# Altium PCB smart-water-sensor.PcbDoc (part 1 of 5)
Units mm, origin at the board's own origin, x right, y up, seen from the top; angles counter-clockwise.
Board outline 124.33 x 108.9 mm, 4 copper layers (Top Layer, Layer 1, Layer 2, Bottom Layer), stack 0.603 mm thick; 150 components, 74 nets, 469 pads, 463 vias.
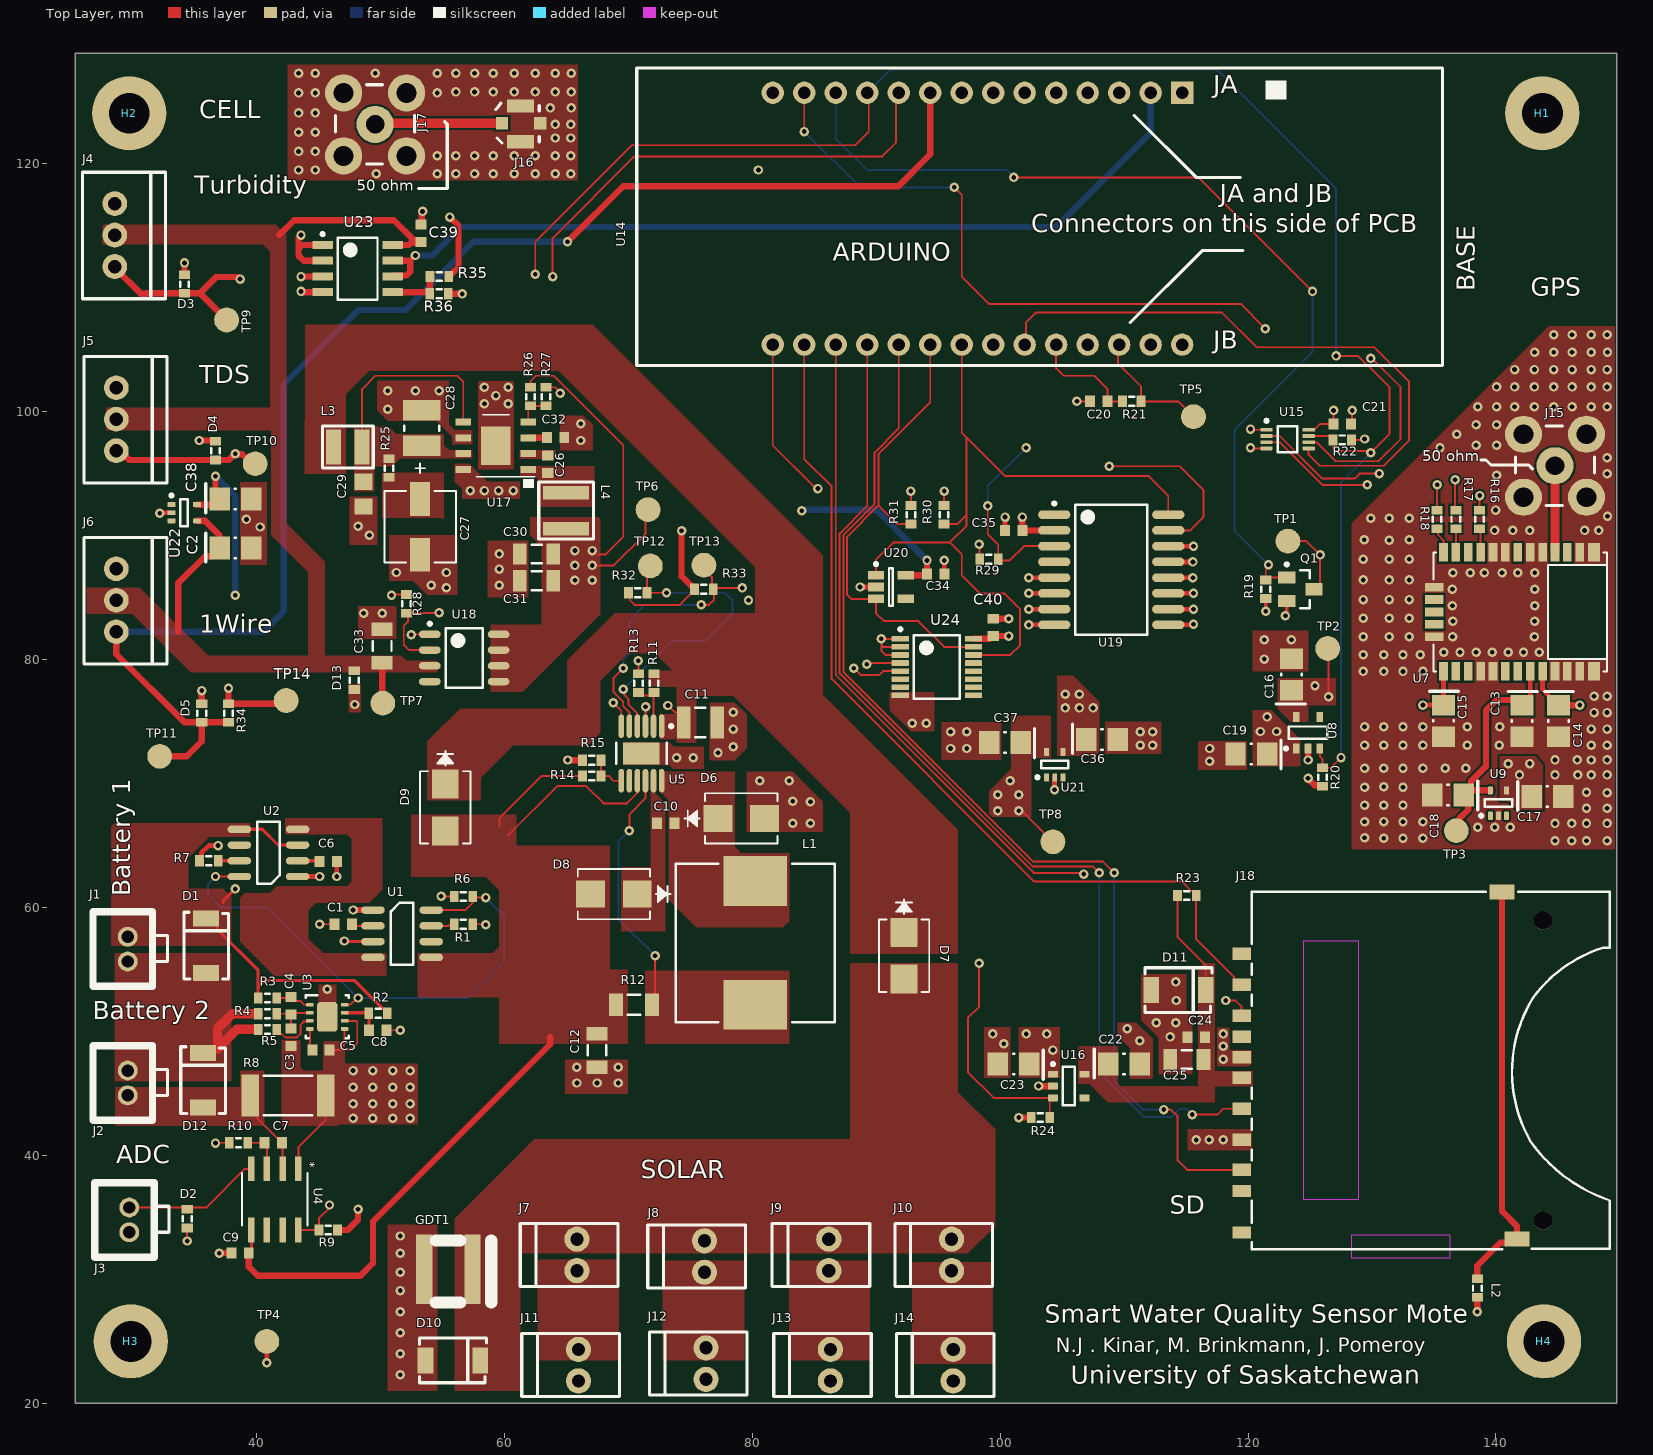
[diagram p0: Top Layer view]
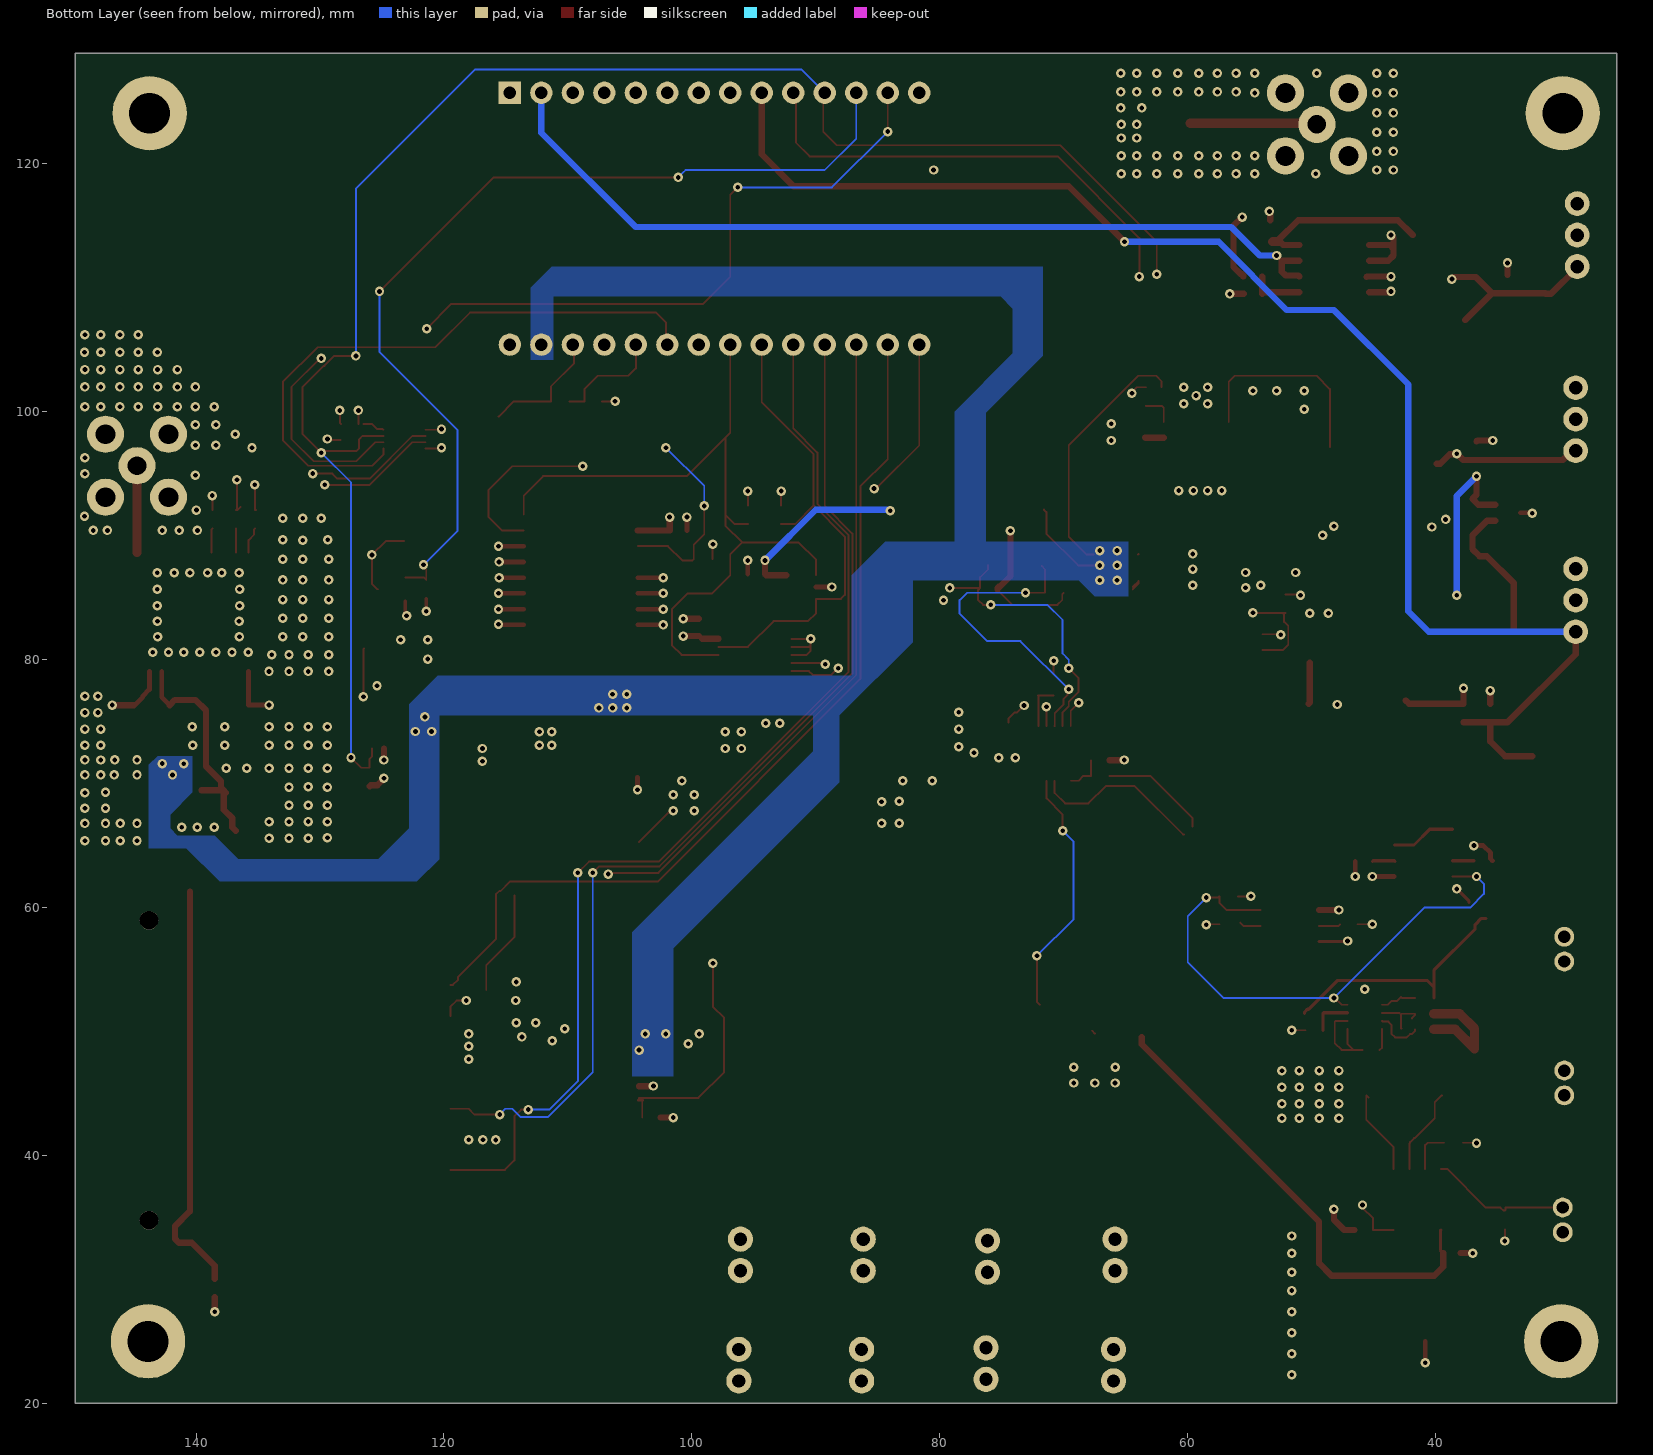
[diagram p1: Bottom Layer view, seen from below]
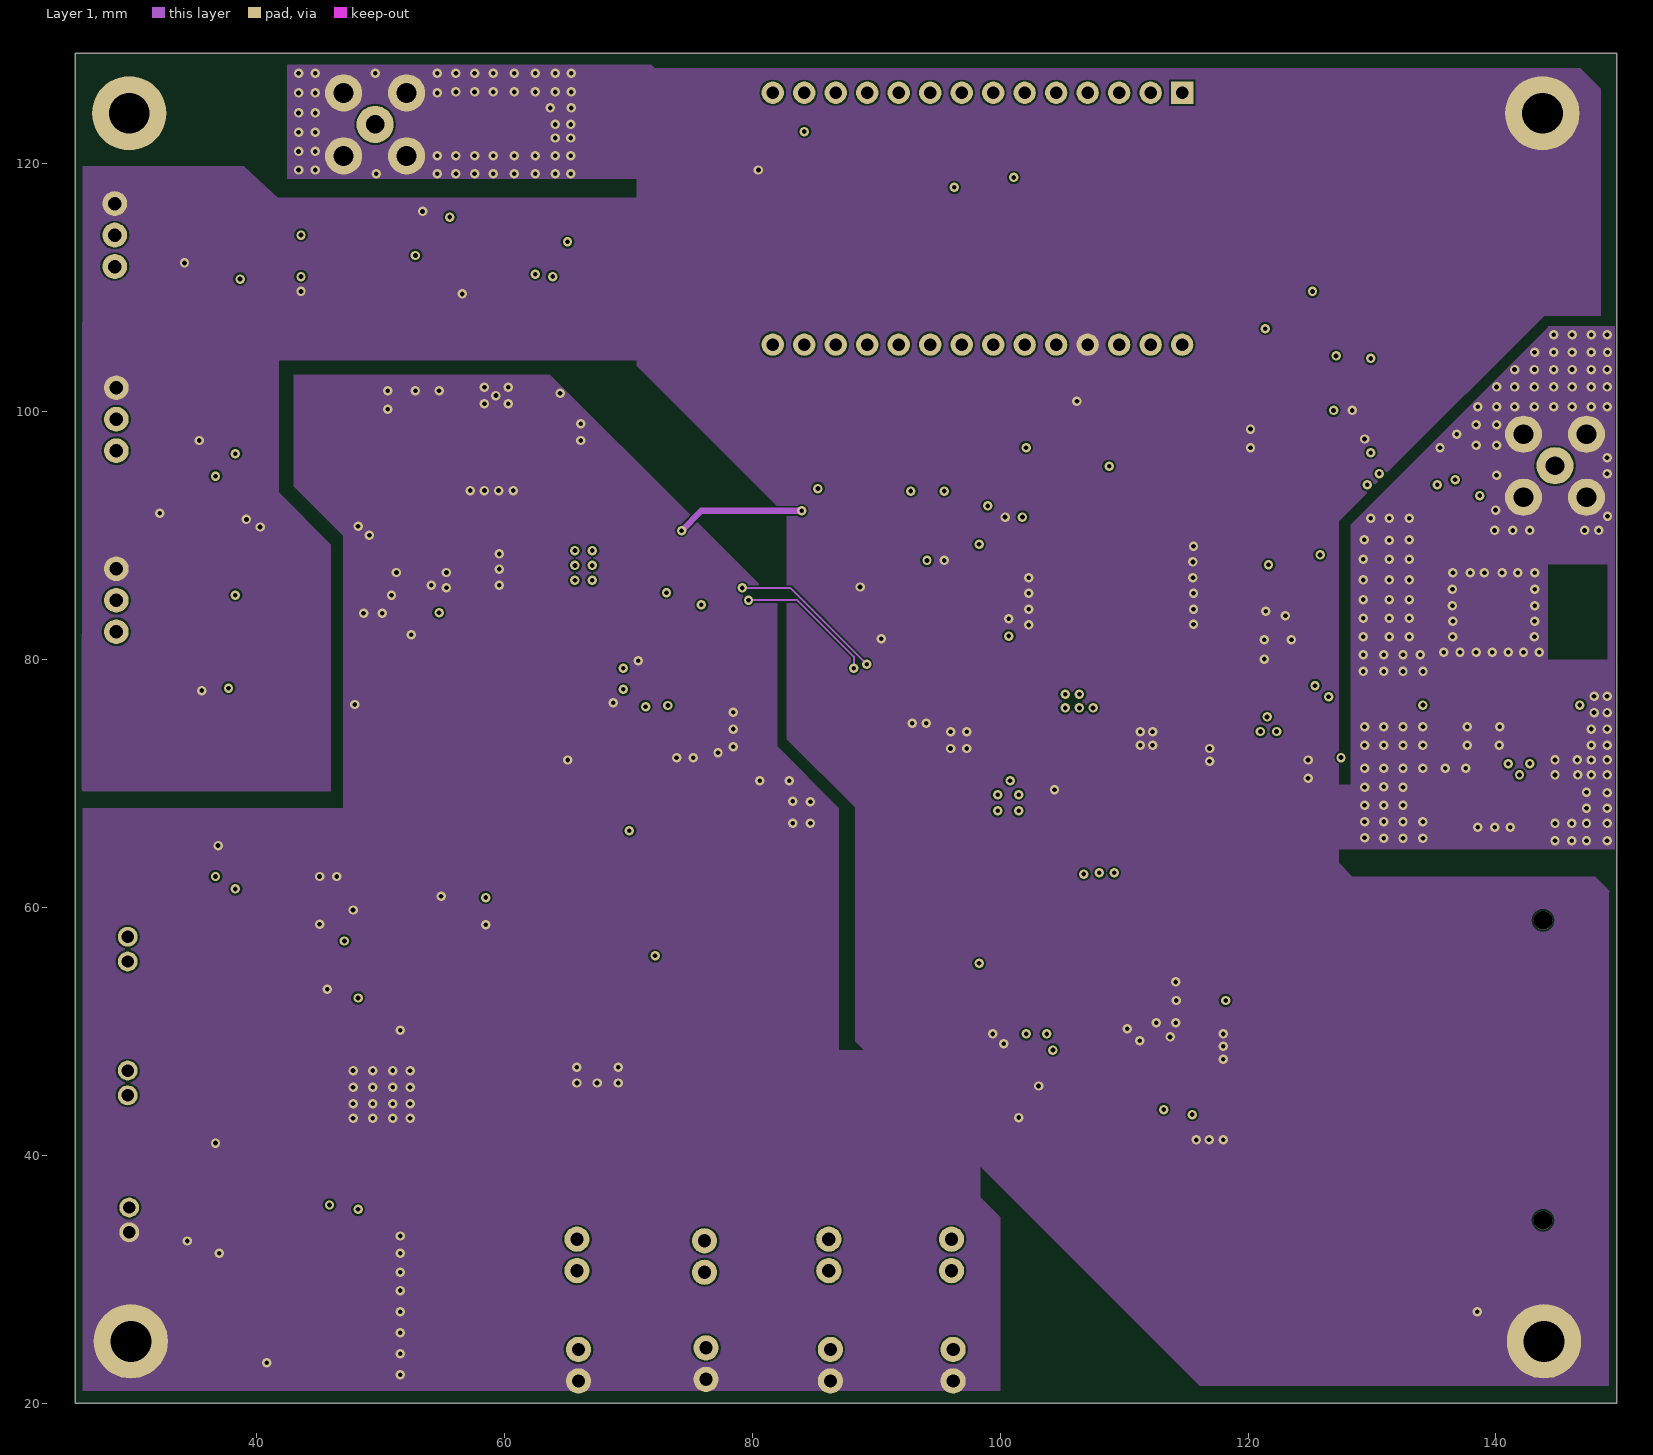
[diagram p2: Layer 1]
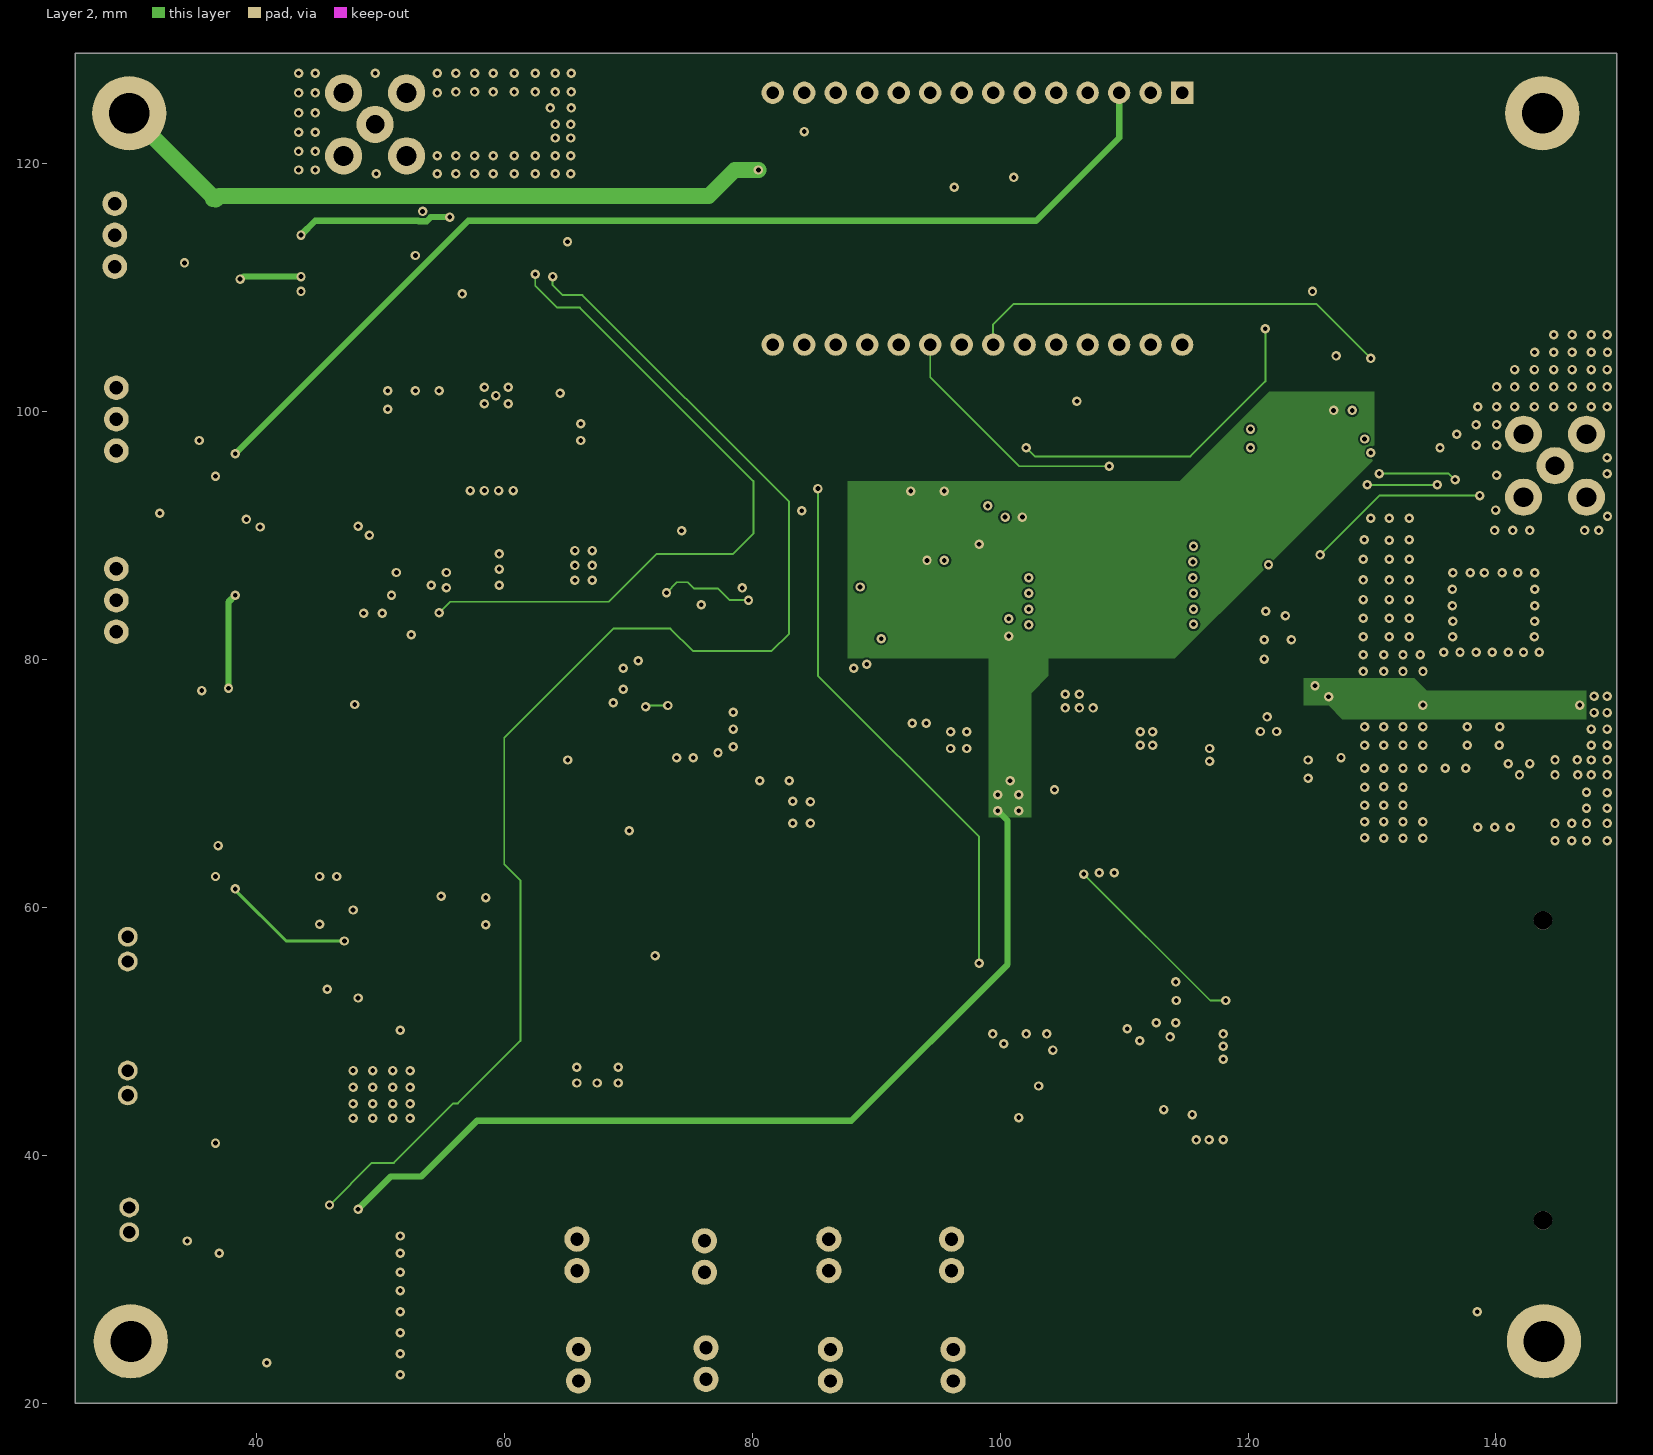
[diagram p3: Layer 2]

## Layer stack, top to bottom
Top Solder: solder mask 0.0102, Solder Resist, Dk 3.5
Top Layer: signal copper 0.0356
Dielectric 2: prepreg 0.0711, PP-006, Dk 4.1
Layer 1: signal copper 0.035
Dielectric 1: dielectric 0.32, FR-4, Dk 4.8
Layer 2: signal copper 0.035
Dielectric 3: prepreg 0.0711, PP-006, Dk 4.1
Bottom Layer: signal copper 0.0356
Bottom Solder: solder mask 0.0102, Solder Resist, Dk 3.5

## Board outline
25.4,20 149.733,20 149.733,128.905 25.4,128.905

## Design rules (kind name [scope] priority, off if disabled: settings)
Clearance "Clearance~Sunstone Circuits" [All] p1: gap=0.152 ignorepadtopadclearanceinfootprint=FALSE except(0: Arc-Hole Track-Hole SMDPad-Hole THPad-Hole Via-Hole Fill-Hole Poly-Hole Region-Hole Text-Hole) // Sunstone Circuits Minimum Clearance Rule (MLB~4&6 Layer Designs)
DiffPairsRouting DiffPairsRouting_1 [(InDifferentialPairClass('All Differential Pairs'))] p1: maxlimit=0.152 minlimit=0.152 mostfreqgap=0.152 toplayer_minwidth=0.381 toplayer_maxwidth=0.381 toplayer_prefwidth=0.381 midlayer1_minwidth=0.381 midlayer1_maxwidth=0.381 midlayer1_prefwidth=0.381 midlayer2_minwidth=0.381 midlayer2_maxwidth=0.381 midlayer2_prefwidth=0.381 bottomlayer_minwidth=0.381 bottomlayer_maxwidth=0.381 bottomlayer_prefwidth=0.381 maxuncoupledlength=12.7
DiffPairsRouting [All] p2 off: maxlimit=0.254 minlimit=0.254 mostfreqgap=0.254 toplayer_minwidth=0.381 toplayer_maxwidth=0.381 toplayer_prefwidth=0.381 midlayer1_minwidth=0.381 midlayer1_maxwidth=0.381 midlayer1_prefwidth=0.381 midlayer2_minwidth=0.381 midlayer2_maxwidth=0.381 midlayer2_prefwidth=0.381 bottomlayer_minwidth=0.381 bottomlayer_maxwidth=0.381 bottomlayer_prefwidth=0.381 maxuncoupledlength=12.7
HoleSize "HoleSize~Sunstone Circuits" [All] p1: absolutevalues=TRUE maxlimit=6.375 minlimit=0.203 maxpercent=80.000 minpercent=20.000 // Sunstone Circuits Hole Size Rule (MLB~4&6 Layer Designs)
HoleSize Testpoint [All] p2: absolutevalues=TRUE maxlimit=2.54 minlimit=0.025 maxpercent=80.000 minpercent=20.000
HoleSize TestPointUsage [All] p3: absolutevalues=TRUE maxlimit=2.54 minlimit=0.025 maxpercent=80.000 minpercent=20.000
MinimumAnnularRing "MinimumAnnularRing~Sunstone Circuits" [All] p1: minimumring=0.178 // Sunstone Circuits Minimum Annular Ring (MLB~4&6 Layer Designs)
MinimumSolderMaskSliver [All] p1: minsoldermaskwidth=0.127
PlaneClearance "PlaneClearance~Sunstone Circuits" [All] p1: clearance=0.305 // Sunstone Circuits Power Plane Clearance Rule (MLB~4&6 Layer Designs)
PlaneConnect "PlaneConnect~Sunstone Circuits" [All] p1: planeconnectstyle=Direct reliefexpansion=0.254 reliefentries=4 reliefconductorwidth=0.203 reliefairgap=0.254 // Sunstone Circuits Power Plane Connect Rule (MLB~4&6 Layer Designs)
PolygonConnect "PolygonConnect~Sunstone Circuits" [All] p1: connectstyle=Direct reliefconductorwidth=0.203 reliefentries=4 polygonreliefangle="90 Angle" airgapwidth=0.254 // Sunstone Circuits Polygon Connect Style (MLB~4&6 Layer Designs)
RoutingVias "RoutingVias~Sunstone Circuits" [All] p1: holewidth=0.381 width=0.762 viastyle="Through Hole" minholewidth=0.203 minwidth=0.61 maxholewidth=0.508 maxwidth=1.016 // Sunstone Circuits Routing Vias Rule (MLB~4&6 Layer Designs)
ShortCircuit "ShortCircuit~Sunstone Circuits" [All] p1: allowed=FALSE // Sunstone Circuits Short Circuit Rule~Do Not Allow (MLB~4&6 Layer Designs)
SilkToSilkClearance [All] p1: silktosilkclearance=0
SilkToSolderMaskClearance [IsPad] p1: minsilkscreentomaskgap=0 clearancetoexposedcopper=TRUE
SolderMaskExpansion "SolderMaskExpansion~Sunstone Circuits" [All] p1: expansion=0.076 istentingtop=FALSE // Sunstone Circuits Solder Mask Expansion Rule (MLB~4&6 Layer Designs)
ViasUnderSMD "ViasUnderSMD~Sunstone Circuits" [All] p1: allowed=FALSE // Sunstone Circuits Vias Under SMD~Do Not Allow (MLB~4&6 Layer Designs)
Width "Width~Sunstone Circuits" [All] p1: maxlimit=2.54 minlimit=0.152 preferedwidth=0.254 // Sunstone Circuits Minimum Width Rule (MLB~4&6 Layer Designs)
22 further rules are at their usual default settings.

## Components (designator, comment, footprint, x,y, rotation, side; value= is the part's Value field where it differs from the comment)
C1 "Cap Semi" 1608[0603] 47,58.65 r0 top value=1nF
C2 "Cap Pol3" 1206-pol 38.301,89 r0 top value=4.7uF
C3 "Cap Semi" 1608[0603] 42.799,49.531 r270 top value=0.1uF
C4 "Cap Semi" 1608[0603] 42.799,52.07 r270 top value=0.1uF
C5 "Cap Semi" 1608[0603] 45.212,48.514 r0 top value=0.33uF
C6 "Cap Semi" 1608[0603] 45.787,63.717 r180 top value=1nF
C7 "Cap Semi" 1608[0603] 41.352,41.021 r0 top value=0.1uF
C8 "Cap Semi" 1608[0603] 49.78,50.1 r180 top value=0.1uF
C9 "Cap Semi" 1608[0603] 38.685,32.131 r180 top value=0.1uF
C10 "Cap Semi" 1608[0603] 73.025,66.802 r0 top value=1uF
C11 "Cap Semi" C1210 75.819,74.93 r180 top value=10uF
C12 "Cap Semi" C1206 67.483,48.473 r90 top value=10uF
C13 "Cap Pol3" 1206-pol 142.113,75.052 r270 top value=4.7uF
C14 "Cap Pol3" 1206-pol 145.034,75.052 r270 top value=4.7uF
C15 "Cap Pol3" 1206-pol 135.763,75.057 r270 top value=4.7uF
C16 "Cap Pol3" 1206-pol 123.5,78.8 r90 top value=4.7uF
C17 "Cap Pol3" 1206-pol 144.15,68.961 r0 top value=4.7uF
C18 "Cap Pol3" 1206-pol 136.139,69.088 r180 top value=4.7uF
C19 "Cap Pol3" 1206-pol 120.264,72.39 r180 top value=4.7uF
C20 "Cap Semi" 1608[0603] 107.95,100.838 r180 top value=0.1uF
C21 "Cap Semi" 1608[0603] 127.6,99 r0 top value=0.1uF
C22 "Cap Pol3" 1206-pol 109.987,47.371 r0 top value=4.7uF
C23 "Cap Pol3" 1206-pol 101.092,47.371 r180 top value=4.7uF
C24 "Cap Semi" 1608[0603] 115.824,49.53 r0 top value=10uF
C25 "Cap Semi" C1206 115.062,47.752 r0 top value=100uF
C26 "Cap Semi" 1608[0603] 63.5,95.758 r270 top value=470nF
C27 "Part Number: 25SVPF27MX" PCAP_SVP_B6 53.213,90.716 r270 top value=Value
C28 "Cap Semi" 1210 53.34,98.679 r270 top value=10uF
C29 "Cap Semi" 0805C 48.641,93.345 r90 top value=4.7uF
C30 "Cap Semi" C1206 62.611,88.519 r0 top value=47uF
C31 "Cap Semi" C1206 62.611,86.36 r0 top value=47uF
C32 "Cap Semi" 1608[0603] 64.135,97.917 r180 top value=2.2uF
C33 "Cap Semi" C1206 50.15,81.1 r270 top value=47uF
C34 "Cap Semi" 1608[0603] 94.8,86.9 r0 top value=0.1uF
C35 "Cap Semi" 1608[0603] 101.092,90.412 r180 top value=0.1uF
C36 "Cap Pol3" 1206-pol 108.221,73.562 r0 top value=4.7uF
C37 "Cap Pol3" 1206-pol 100.392,73.3 r180 top value=4.7uF
C38 "Cap Pol3" 1206-pol 38.301,92.964 r0 top value=4.7uF
C39 "Cap Semi" 1608[0603] 53.281,114.406 r90 top value=0.1uF
C40 "Cap Semi" 1608[0603] 99.441,82.6 r90 top value=0.1uF
D1 "Diode" smbj 35.953,57.023 r90 top
D2 "Diode" J1-0603 34.417,34.9 r90 top
D3 "Diode" J1-0603 34.2,110.3 r270 top
D4 "Diode" J1-0603 36.7,96.854 r270 top
D5 "Diode" J1-0603 35.595,75.689 r270 top
D6 "SSB43L-E3/52T" DIODE_DO214AA_00 79.121,67.183 r0 top
D7 "SSB43L-E3/52T" DIODE_DO214AA_00 92.25,56.1 r270 top
D8 "SSB43L-E3/52T" DIODE_DO214AA_00 68.845,61.087 r180 top
D9 "SSB43L-E3/52T" DIODE_DO214AA_00 55.245,68.072 r270 top
D10 "Diode" smbj 55.952,23.464 r0 top
D11 "Diode" smbj 114.486,53.34 r0 top
D12 "Diode" smbj 35.703,46.173 r90 top
D13 "Diode" J1-0603 47.9,78.34 r90 top
GDT1 "2031-xxT-SM" 2031-xxT-SM 55.459,30.64 r180 top
H1 "Mounting hole" "M3 hole" 143.873,124.079 r0 top
H2 "Mounting hole" "M3 hole" 29.873,124.079 r0 top
H3 "Mounting hole" "M3 hole" 30,25 r0 top
H4 "Mounting hole" "M3 hole" 144,25 r0 top
J1 "connector-2mm" B2B-PH-K-S(LF)(SN) 29.718,56.642 r90 top
J2 "connector-2mm" B2B-PH-K-S(LF)(SN) 29.718,45.847 r90 top
J3 "connector-2mm" B2B-PH-K-S(LF)(SN) 29.845,34.798 r90 top
J4 "0705430002" 0705430002 28.575,111.713 r90 top
J5 "0705430002" 0705430002 28.702,96.854 r90 top
J6 "0705430002" 0705430002 28.702,82.249 r90 top
J7 "0022232021" 0022232021 68.398,30.703 r270 top
J8 "0022232021" 0022232021 78.685,30.576 r270 top
J9 "0022232021" 0022232021 88.718,30.703 r270 top
J10 "0022232021" 0022232021 98.624,30.703 r270 top
J11 "0022232021" 0022232021 68.525,21.813 r270 top
J12 "0022232021" 0022232021 78.812,21.94 r270 top
J13 "0022232021" 0022232021 88.845,21.813 r270 top
J14 "0022232021" 0022232021 98.751,21.813 r270 top
J15 "5-1814832-1" 5-1814832-1 144.764,95.643 r0 top
J16 "A-1JB" A-1JB 61.314,123.179 r180 top
J17 "5-1814832-1" 5-1814832-1 49.578,123.179 r0 top
J18 "SD Card Connector, Push & Push" 693061010911 134.747,46.863 r90 top
L1 "Inductor" SRR1280-390M 80.24,57.14 r270 top value=39uH
L2 "Inductor" J1-0603 138.5,29.3 r270 top value=1k
L3 "Inductor" 74479899111 46.228,97.155 r0 top value=110nH
L4 "Inductor" PA4332.222NLT 64.982,93.122 r270 top value=2.2uH
Q1 "BSS138" FAIR-SOT23-3_V 124.227,85.678 r0 top
R1 "Res3" J1-0603 56.7,58.65 r180 top value=130k
R2 "Res3" J1-0603 49.818,51.47 r0 top value=100
R3 "Res3" J1-0603 40.894,52.705 r0 top value=160
R4 "Res3" J1-0603 40.894,51.435 r0 top value=270
R5 "Res3" J1-0603 40.894,50.165 r0 top value=100
R6 "Res3" J1-0603 56.7,60.9 r0 top value=100k
R7 "Res3" J1-0603 36.161,63.771 r0 top value=130k
R8 "Res3" 2512-resistor 42.545,44.847 r180 top value="0.50 ohm"
R9 "Res3" J1-0603 45.797,33.985 r0 top value=4.7k
R10 "Res3" J1-0603 38.558,41.021 r180 top value=100k
R11 "Res3" J1-0603 72.077,78.1 r90 top value=330k
R12 "Res3" RESC1206 70.47,52.16 r180 top value=0.22
R13 "Res3" J1-0603 70.817,78.1 r270 top value=100k
R14 "Res3" J1-0603 67.056,70.612 r180 top value=634k
R15 "Res3" J1-0603 67.056,71.882 r0 top value=412k
R16 "Res3" J1-0603 138.684,91.313 r270 top value="220 ohm"
R17 "Res3" J1-0603 136.764,91.313 r270 top value="220 ohm"
R18 "Res3" J1-0603 135.255,91.313 r270 top value="220 ohm"
R19 "Res3" J1-0603 121.433,85.678 r90 top value=100k
R20 "Res3" J1-0603 125.998,70.525 r90 top value=10k
R21 "Res3" J1-0603 110.617,100.838 r0 top value=10k
R22 "Res3" J1-0603 127.6,97.73 r180 top value=10k
R23 "Res3" J1-0603 115.062,60.96 r180 top value=10k
R24 "Res3" J1-0603 103.251,43.053 r0 top value=10k
R25 "Res3" J1-0603 50.7,95.451 r90 top value=0.1ohm
R26 "Res3" J1-0603 62.103,101.219 r90 top value=88.7k
R27 "Res3" J1-0603 63.373,101.219 r270 top value=22.1k
R28 "Res3" J1-0603 52.1,84.5 r270 top value=10k
R29 "Res3" J1-0603 99.1,88.1 r180 top value=100k
R30 "Res3" J1-0603 95.471,91.688 r90 top value=10k
R31 "Res3" J1-0603 92.804,91.688 r90 top value=10k
R32 "Res3" J1-0603 70.764,85.399 r0 top value=10k
R33 "Res3" J1-0603 76.1,85.671 r0 top value=10k
R34 "Res3" J1-0603 37.751,75.689 r90 top value=4.7k
R35 "Res3" J1-0603 54.757,110.9 r0 top value=1.8k
R36 "Res3" J1-0603 54.74,109.51 r180 top value=3.3k
TP1 "Testpoint" testpoint 123.214,89.561 r0 top
TP2 "Testpoint" testpoint 126.429,80.9 r0 top
TP3 "Testpoint" testpoint 136.8,66.2 r0 top
TP4 "Testpoint" testpoint 40.844,25 r0 top
TP5 "Testpoint" testpoint 115.6,99.6 r0 top
TP6 "Testpoint" testpoint 71.6,92.1 r0 top
TP7 "Testpoint" testpoint 50.197,76.487 r0 top
TP8 "Testpoint" testpoint 104.262,65.3 r0 top
TP9 "Testpoint" testpoint 37.6,107.4 r0 top
TP10 "Testpoint" testpoint 39.9,95.8 r90 top
TP11 "Testpoint" testpoint 32.2,72.2 r270 top
TP12 "Testpoint" testpoint 71.78,87.558 r90 top
TP13 "Testpoint" testpoint 76.1,87.619 r90 top
TP14 "Testpoint" testpoint 42.4,76.7 r90 top
U1 "TPS25921ADR" D0008A_L 51.755,57.888 r0 top
U2 "TPS25921ADR" D0008A_L 40.978,64.406 r180 top
U3 "BQ29209DRBR" DRB0008B_V 45.72,51.181 r0 top
U4 "DS2438" 21-0041B_8 41.479,36.449 r270 top
U5 "LT3652EMSE#PBF" LT-MSE-12-EDP_M 71.064,72.431 r270 top
U7 "CAM-M8" CAM 141.464,83.846 r270 top
U8 "LP5907MFX-3.3/NOPB" DBV0005A_L 124.841,74.104 r90 top
U9 "TPS71533DCKR" DCK0005A_L 140.208,68.428 r90 top
U14 "Arduino MKRGSM" MKRGSM 122.441,115.73 r270 top
U15 "SN74LVC2G241DCUR" DCU0008A_M 123.19,97.79 r0 top
U16 "LP5907MFX-3.3/NOPB" DBV0005A_L 105.537,45.593 r0 top
U17 "LMR23625CFDDAR" DDA0008E_L 59.309,97.254 r180 top
U18 "IC POWER HI SIDE SWITCH 8DSO" SOIC127P600-8N 56.764,80.137 r0 top
U19 "DS3231SN#T&R" W16#H2_M 108.966,87.249 r0 top
U20 "DS28CM00R-A00+T" U5+1_M 91.186,85.852 r0 top
U21 "TPS71533DCKR" DCK0005A_L 104.406,71.53 r90 top
U22 "TPS71533DCKR" DCK0005A_L 34.175,91.85 r0 top
U23 "OPA2342UA/2K5" D0008A_M 48.17,111.55 r0 top
U24 "PCA9534PWR" PW0016A_N 94.9,79.4 r0 top

## Footprints (in the part's own frame and the unit in brackets; to place one, negate y for a bottom-side part, rotate by r counter-clockwise, add the part's x,y. Pads: shape width x height; smd on the part's side, far side on the other; paste and mask are expansions set on the pad)
5-1814832-1 [mm] "SMA Connector PCB Through-hole"
  round 3 hole 1.6: G1(-2.54,2.54) G2(2.54,2.54) G3(-2.54,-2.54) G4(2.54,-2.54)
  round 3 hole 1.5: P(0,0)
  silkscreen extent -3.2,-3.2 3.2,3.2, body extent -3.2,-3.2 3.2,3.2, height 9.51
21-0041B_8 [mil]
  rect 78x21 smd paste+0 mask+0: 1(-97,75) 2(-97,25) 3(-97,-25) 4(-97,-75) 5(97,-75) 6(97,-25) 7(97,25) 8(97,75)
  silkscreen extent -84,-104 84,104, body extent -119,-98 125,99, height 69
0805C [mm]
  rect 1.3x1.45 smd: 1(-1,0) 2(1,0)
  body extent -1.1,-0.72 1.1,0.72, height 0.9
1206-pol [mm]
  rect 1.65x1.85 smd: 1(-1.275,0) 2(1.275,0)
  silkscreen extent -2.39,-1.13 0.05,1.22, body extent -1.7,-0.9 1.7,0.9, height 1.8
1210 [mm]
  rect 1.65x3 smd: 1(-1.425,0) 2(1.425,0)
  silkscreen extent -0.2,-1.4 0.2,1.4, body extent -1.85,-1.5 1.85,1.5, height 2.1
1608[0603] [mm] "Chip Capacitor, Body 1.6x0.8mm, IPC High Density"
  rect 0.8x0.9 smd: 1(-0.7,0) 2(0.7,0)
  body extent -0.87,-0.48 0.87,0.48, height 1.3
2031-xxT-SM [mm]
  rect 1.3x5.6 smd: 1(1.92,-0.19) 2(-1.99,-0.18)
  silkscreen extent -3.5,-2.5 1,2.5, body extent -2.21,-2.72 2.19,2.28, height 5
2512-resistor [mm]
  rect 1.4x3.4 smd: 1(-3.05,0) 2(3.05,0)
  silkscreen extent -1.95,-1.6 1.95,1.6, body extent -3.3,-1.7 3.3,1.7, height 0.7
0022232021 [mil] "2-pin header"
  round 80 hole 42: 1(-100,-100) 2(0,-100)
  silkscreen extent -150,-280 50,30, body extent -149,-223 45,27, height 420
0705430002 [mm] "CONN HEADER VERT 3POS 2.54MM"
  round 2 hole 1.09: 1(0,0) 2(2.54,0) 3(5.08,0)
  silkscreen extent -2.6,-4.1 7.6,2.6, body extent -2.54,-4.06 7.62,2.54, height 11.81
74479899111 [mm] "FIXED IND 110NH 4A 7 MOHM SMD"
  rect 1.2x2.8 smd: 1(0,0) 2(2.3,0)
  silkscreen extent -0.9,-1.7 3.2,1.7, body extent -0.43,-1.37 2.77,1.23, height 0.6
693061010911 [mm] "SD Card Connector, Push & Push"
  rect 1x1.5 smd: 1(6.9,15.26) 2(4.4,15.26) 3(1.05,15.26) 4(-0.6,15.26) 5(-3.1,15.26) 6(-5.6,15.26) 7(-8.03,15.26) 8(-9.73,15.26) 9(9.4,15.26) CD(2.7,15.26) WP(-13.08,15.26)
  round 1.5 hole 1.5 unplated: MH1(-12.1,-9.05) MH2(12.1,-9.05)
  rect 1.2x2 smd: Shield(-13.6,-6.95) Shield(14.4,-5.75)
  Top Layer keep-out region: -10.41,5.8 10.42,5.8 10.42,10.3 -10.41,10.3
  Top Layer keep-out region: -15.1,-1.55 -13.3,-1.55 -13.3,6.4 -15.1,6.4
  silkscreen extent -14.45,-14.45 14.4,14.45, body extent -14.4,-14.45 14.4,15.6, height 2.94
A-1JB [mm] "UMC Connector"
  rect 2.2x1.05 smd: 1(0,1.4) 3(0,-1.5)
  rect 1x1 smd: 2(1.5,-0.1) 4(-1.6,-0.1)
  silkscreen extent -1.5,-1.7 2,1.5, body extent -1.45,-1.6 1.65,1.4, height 1.26
B2B-PH-K-S(LF)(SN) [mm] "B2B-PH-K-S(LF)(SN)"
  round 1.6 hole 1: 1(-1,0.1) 2(1,0.1)
  silkscreen extent -3,-3.1 3,2.9, body extent -2.95,-1.6 2.95,2.9, height 6.01
C1206 [mm] "Chip Capacitor, Body 3.2x1.6mm, IPC High Density"
  rect 1.1x1.7 smd: 1(-1.35,0) 2(1.35,0)
  silkscreen extent -0.4,-0.75 0.4,0.75, body extent -1.7,-0.9 1.7,0.9, height 1.3
C1210 [mm] "Chip Capacitor, Body 3.2x2.5mm, IPC High Density"
  rect 1.1x2.6 smd: 1(-1.35,0) 2(1.35,0)
  silkscreen extent -0.4,-1.2 0.4,1.2, body extent -1.7,-1.35 1.7,1.35, height 1.3
CAM [mm] "u-blox CAM GNSS antenna module"
  rect 1.5x0.7 smd: 1(4.8,-5.7) 2(4.8,-4.7) 3(4.8,-3.7) 4(4.8,-2.7) 5(4.8,-1.7) 6(4.8,-0.7) 7(4.8,0.3) 8(4.8,1.3) 9(4.8,2.3) 10(4.8,3.3) 11(4.8,4.3) 12(4.8,5.3) 15(-4.8,5.3) 16(-4.8,4.3) 17(-4.8,3.3) 18(-4.8,2.3) 19(-4.8,1.3) 20(-4.8,0.3) 21(-4.8,-0.7) 22(-4.8,-1.7) 23(-4.8,-2.7) 24(-4.8,-3.7) 25(-4.8,-4.7) 26(-4.8,-5.7)
  rect 1.5x1 smd: 13(4.8,6.45) 14(-4.8,6.45)
  rect 0.7x1.5 smd: 27(-2,-6.45) 28(-1,-6.45) 29(0,-6.45) 30(1,-6.45) 31(2,-6.45)
  Multi-Layer pour cut-out: -3.8,7.5 -3.8,2.75 3.8,2.75 3.8,7.5
  silkscreen extent -4.8,-6.5 4.8,7.5, body extent -4.8,-6.5 4.8,7.5, height 1.97
D0008A_L [mm]
  oval 1.9x0.6 smd paste-0.102 mask+0.051: 1(-2.35,1.905) 2(-2.35,0.635) 3(-2.35,-0.635) 4(-2.35,-1.905) 5(2.35,-1.905) 6(2.35,-0.635) 7(2.35,0.635) 8(2.35,1.905)
  silkscreen extent -0.9,-2.5 0.9,2.5, body extent -3,-2.45 3,2.45, height 1.46
D0008A_M [mm] "SOIC, 8-Leads, Body 5x4mm, Pitch 1.27mm, IPC Low Density"
  rrect15% 1.65x0.65 smd: 1(-2.825,1.905) 2(-2.825,0.635) 3(-2.825,-0.635) 4(-2.825,-1.905) 5(2.825,-1.905) 6(2.825,-0.635) 7(2.825,0.635) 8(2.825,1.905)
  silkscreen extent -2.95,-2.5 1.6,2.9, body extent -3,-2.45 3,2.45, height 1.63
DBV0005A_L [mm] "SOT23, 5-Leads, Body 3.05x1.75mm, Pitch 0.95mm, IPC High Density"
  rrect18% 0.8x0.55 smd: 1(-1.275,0.95) 2(-1.275,0) 3(-1.275,-0.95) 4(1.275,-0.95) 5(1.275,0.95)
  silkscreen extent -1.4,-1.55 0.5,1.9, body extent -1.42,-1.46 1.42,1.46, height 1.08
DCK0005A_L [mm] "SOT23, 5-Leads, Body 2.15x1.4mm, Pitch 0.65mm, IPC High Density"
  rrect25% 0.65x0.4 smd mask+0.127: 1(-1.025,0.65) 2(-1.025,0) 3(-1.025,-0.65) 4(1.025,-0.65) 5(1.025,0.65)
  silkscreen extent -1.15,-1.1 0.3,1.52, body extent -1.14,-1 1.14,1, height 0.94
DCU0008A_M [mm] "SOP, 8-Leads, Body 2.4x2.1mm, Pitch 0.5mm, IPC Low Density"
  rrect33% 1x0.3 smd mask+0.127: 1(-1.7,0.75) 2(-1.7,0.25) 3(-1.7,-0.25) 4(-1.7,-0.75) 5(1.7,-0.75) 6(1.7,-0.25) 7(1.7,0.25) 8(1.7,0.75)
  silkscreen extent -1.82,-1.05 0.8,1.6, body extent -1.56,-1 1.56,1, height 0.9
DDA0008E_L [mm]
  rect 1.25x0.55 smd paste+0 mask+0.051: 1(-2.625,1.905) 2(-2.625,0.635) 3(-2.625,-0.635) 4(-2.625,-1.905) 5(2.625,-1.905) 6(2.625,-0.635) 7(2.625,0.635) 8(2.625,1.905)
  rect 2.4x3.1 smd paste+0 mask+0.051: 9(0,0)
  silkscreen extent -3.13,-2.5 1.55,3.4, body extent -3,-2.45 3,2.45, height 1.57
DIODE_DO214AA_00 [mil]
  rect 92x85 smd paste+0 mask+0: 1(-74,0) 2(74,0)
  silkscreen extent -180,-80 115,80, body extent -114,-79 106,71, height 96
DRB0008B_V [mm] "SON, 8-Leads, Body 3x3mm, Pitch 0.65mm, Thermal Pad 2.4x1.65mm, TI Recommended"
  rrect33% 0.6x0.3 smd mask+0.203: 1(-1.4,0.975) 2(-1.4,0.325) 3(-1.4,-0.325) 4(-1.4,-0.975) 5(1.4,-0.975) 6(1.4,-0.325) 7(1.4,0.325) 8(1.4,0.975)
  rrect33% 1.65x2.4 smd paste-1.2 mask+0.203: 9(0,0)
  silkscreen extent -1.73,-1.73 1.73,1.73, body extent -1.5,-1.5 1.5,1.5, height 0.96
FAIR-SOT23-3_V [mm] "SOT23, 3-Leads, Body 3.12x1.5mm, Pitch 0.95mm"
  rect 1.4x1 smd: 1(-1.1,0.95) 2(-1.1,-0.95) 3(1.1,0)
  silkscreen extent -1.22,-1.55 0.75,2.12, body extent -1.35,-1.56 1.35,1.56, height 1.2
J1-0603 [mm] "Chip Resistor, Body 1.6x0.8mm, IPC High Density"
  rect 0.7x0.9 smd: 1(-0.75,0) 2(0.75,0)
  silkscreen extent -0.2,-0.35 0.2,0.35, body extent -0.85,-0.48 0.85,0.48, height 0.9
LT-MSE-12-EDP_M [mm] "SOP, 12-Leads, Body 4.1x3.1mm, Pitch 0.65mm, Thermal Pad 2.95x1.76mm, IPC Low Density"
  oval 1.9x0.45 smd mask+0.203: 1(-2.2,1.625) 2(-2.2,0.975) 3(-2.2,0.325) 4(-2.2,-0.325) 5(-2.2,-0.975) 6(-2.2,-1.625) 7(2.2,-1.625) 8(2.2,-0.975) 9(2.2,-0.325) 10(2.2,0.325) 11(2.2,0.975) 12(2.2,1.625)
  rect 1.76x2.95 smd mask+0.203: 13(0,0)
  silkscreen extent -2.32,-2.05 0.85,2.53, body extent -1.55,-2.05 1.55,2.05, height 1.1
"M3 hole" [mm] "M3 hole"
  round 6 hole 3.3: 1(-0.127,0)
MKRGSM [mm] "MKRGSM"
  rect 1.8x1.8 hole 1: 1(-10,-7.76)
  round 1.8 hole 1: 2(-10,-10.3) 3(-10,-12.84) 4(-10,-15.38) 5(-10,-17.92) 6(-10,-20.46) 7(-10,-23) 8(-10,-25.54) 9(-10,-28.08) 10(-10,-30.62) 11(-10,-33.16) 12(-10,-35.7) 13(-10,-38.24) 14(-10,-40.78) 15(10.32,-40.78) 16(10.32,-38.24) 17(10.32,-35.7) 18(10.32,-33.16) 19(10.32,-30.62) 20(10.32,-28.08) 21(10.32,-25.54) 22(10.32,-23) 23(10.32,-20.46) 24(10.32,-17.92) 25(10.32,-15.38) 26(10.32,-12.84) 27(10.32,-10.3) 28(10.32,-7.76)
  silkscreen extent -12,-51.76 12,13.24, body extent -11.3,-42.3 11.57,-6.29, height 8.51
PA4332.222NLT [mm] "FIXED IND 2.2UH 4.3A 48 MOHM SMD"
  rect 1.1x3.7 smd: 1(-0.345,0) 2(2.555,0)
  silkscreen extent -1.22,-2.2 3.4,2.2, body extent -0.87,-2.05 3.28,2.05, height 2
PCAP_SVP_B6 [mil]
  rect 107x64 smd paste+0 mask+0: 1(-88.5,0) 2(88.5,0)
  silkscreen extent -201,-114 114,114, body extent -126,-107 118,110, height 238
PW0016A_N [mm] "SOP, 16-Leads, Body 5.1x4.5mm, Pitch 0.65mm, IPC Medium Density"
  rrect22% 1.4x0.45 smd mask+0.127: 1(-2.95,2.275) 2(-2.95,1.625) 3(-2.95,0.975) 4(-2.95,0.325) 5(-2.95,-0.325) 6(-2.95,-0.975) 7(-2.95,-1.625) 8(-2.95,-2.275) 9(2.95,-2.275) 10(2.95,-1.625) 11(2.95,-0.975) 12(2.95,-0.325) 13(2.95,0.325) 14(2.95,0.975) 15(2.95,1.625) 16(2.95,2.275)
  silkscreen extent -3.07,-2.55 1.85,3.17, body extent -3.21,-2.5 3.21,2.5, height 1
RESC1206 [mm] "Chip Resistor, Body 3.2x1.6mm, IPC Medium Density"
  rect 1.15x1.8 smd: 1(-1.45,0) 2(1.45,0)
  silkscreen extent -0.5,-0.8 0.5,0.8, body extent -1.67,-0.87 1.67,0.87, height 0.75
smbj [mm] "Bourns TVS Diode"
  rect 1.27x2.1 smd: 1(-2.3,0) 2(2.1,0)
  silkscreen extent -2.8,-1.8 2.6,1.8, body extent -2.84,-1.86 2.56,1.76, height 2.5
SOIC127P600-8N [mm]
  oval 1.75x0.6 smd: 1(-2.775,1.905) 2(-2.775,0.635) 3(-2.775,-0.635) 4(-2.775,-1.905) 5(2.775,-1.905) 6(2.775,-0.635) 7(2.775,0.635) 8(2.775,1.905)
  silkscreen extent -2.9,-2.4 1.5,2.88, body extent -3,-2.4 3,2.4, height 1.75
SRR1280-390M [mm] "Precision Wire Wound Inductor, 2-Leads, Body 12.50x12.50mm, IPC Medium Density"
  rect 4x5.15 smd: 1(-5,0) 2(5,0)
  silkscreen extent -6.4,-6.4 6.4,6.4, body extent -6.35,-6.25 6.35,6.25, height 8.1
testpoint [mm] "Testpoint"
  round 2 smd: 1(0,0)
U5+1_M [mm] "SOT23, 5-Leads, Body 2.9x1.6mm, Pitch 0.95mm, Lead Span 2.8mm, IPC Low Density"
  rect 1.3x0.7 smd mask+0.127: 1(-1.2,0.95) 2(-1.2,0) 3(-1.2,-0.95) 4(1.2,-0.95) 5(1.2,0.95)
  silkscreen extent -1.32,-1.5 0.15,1.97, body extent -0.87,-1.5 0.87,1.5, height 1.45
W16#H2_M [mm] "SOIC, 16-Leads, Body 10.3x7.5mm, Pitch 1.27mm, IPC Low Density"
  oval 2.6x0.7 smd: 1(-4.6,4.445) 2(-4.6,3.175) 3(-4.6,1.905) 4(-4.6,0.635) 5(-4.6,-0.635) 6(-4.6,-1.905) 7(-4.6,-3.175) 8(-4.6,-4.445) 9(4.6,-4.445) 10(4.6,-3.175) 11(4.6,-1.905) 12(4.6,-0.635) 13(4.6,0.635) 14(4.6,1.905) 15(4.6,3.175) 16(4.6,4.445)
  silkscreen extent -4.72,-5.25 2.9,5.47, body extent -3.8,-5.25 3.8,5.25, height 2.65

## Part data
C1 C6: "Capacitor (Semiconductor SIM Model)", Capacitance=1nF, Case/Package=0603, Case Code (Metric)=1608, Dielectric=X7R, Dielectric Material=Ceramic, Manufacturer="Kyocera AVX", Manufacturer Part Number=06035C102KAT2A, Max Operating Temperature=125°C, Min Operating Temperature=-55°C, Package Quantity=4000, Supplier Part Number 1=478-1215-1-ND, Tolerance=10%, Voltage=50V, Case Code (Imperial)=0603, ComponentLink1Description=https://datasheet.ciiva.com/11787/0900766b802d4698-11787050.pdf?src-supplier=RSComponents, ComponentLink1URL=https://datasheet.ciiva.com/11787/0900766b802d4698-11787050.pdf?src-supplier=RSComponents, ComponentLink2Description=https://datasheet.ciiva.com/1124/1679506-1124839.pdf?src-supplier=Element14, ComponentLink2URL=https://datasheet.ciiva.com/1124/1679506-1124839.pdf?src-supplier=Element14, ComponentLink3Description=https://datasheet.ciiva.com/14595/70001075-14595287.pdf?src-supplier=Allied+Electronics, ComponentLink3URL=https://datasheet.ciiva.com/14595/70001075-14595287.pdf?src-supplier=Allied+Electronics, ComponentLink4Description=https://datasheet.ciiva.com/1124/1679506-1124840.pdf?src-supplier=Element14, ComponentLink4URL=https://datasheet.ciiva.com/1124/1679506-1124840.pdf?src-supplier=Element14, ComponentLink5Description=https://datasheet.ciiva.com/7855/1679506-7855080.pdf?src-supplier=Element14, ComponentLink5URL=https://datasheet.ciiva.com/7855/1679506-7855080.pdf?src-supplier=Element14, ComponentLink6Description=https://datasheet.ciiva.com/2987/cx7r-2987819.pdf?src-supplier=Avnet, ComponentLink6URL=https://datasheet.ciiva.com/2987/cx7r-2987819.pdf?src-supplier=Avnet, ComponentLink7Description=https://datasheet.ciiva.com/150/cx7r-150236.pdf?src-supplier=Digi-Key, ComponentLink7URL=https://datasheet.ciiva.com/150/cx7r-150236.pdf?src-supplier=Digi-Key, ComponentLink8Description=https://datasheet.ciiva.com/2987/cx7r-2987820.pdf?src-supplier=Avnet, ComponentLink8URL=https://datasheet.ciiva.com/2987/cx7r-2987820.pdf?src-supplier=Avnet, ComponentLink9Description=https://datasheet.ciiva.com/150/cx7r-150237.pdf?src-supplier=Digi-Key, ComponentLink9URL=https://datasheet.ciiva.com/150/cx7r-150237.pdf?src-supplier=Digi-Key, ComponentLink10Description=https://datasheet.ciiva.com/16327/cx7r-16327069.pdf?src-supplier=Future+Electronics, ComponentLink10URL=https://datasheet.ciiva.com/16327/cx7r-16327069.pdf?src-supplier=Future+Electronics, ComponentLink11Description=https://datasheet.ciiva.com/16538/cx7r-16538173.pdf?src-supplier=Avnet+Asia, ComponentLink11URL=https://datasheet.ciiva.com/16538/cx7r-16538173.pdf?src-supplier=Avnet+Asia, ComponentLink12Description=https://datasheet.ciiva.com/150/cx7r-150238.pdf?src-supplier=Digi-Key, ComponentLink12URL=https://datasheet.ciiva.com/150/cx7r-150238.pdf?src-supplier=Digi-Key, Contact Plating=Tin, Depth=0.81mm, Height=0.9mm, LatestRevisionDate=29-May-2009, LatestRevisionNote="IPC-7351 Footprint Added.", Lead Free="Lead Free", Length=1.6mm, Mount="Surface Mount", Number of Pins=2, PackageDescription="Chip Capacitor", PackageReference=C1206, Packaging="Tape and Reel", Pricing 1="1 = 0.10000, 10 = 0.05800, 100 = 0.02590, 500 = 0.01852, 1000 = 0.01455 (USD)", Published=8-Jun-2000, Publisher="Altium Limited", Radiation Hardening=No, REACH SVHC="No SVHC", RoHS=Yes, Stock 1=5706824, Supplier 1=Digi-Key, Termination=SMD/SMT, Thickness=0.035inch, Voltage Rating=50V, Voltage Rating (DC)=50V, Weight=7.1E-05oz, Width=0.81mm
C2 C13 C14 C15 C16 C17 C18 C19 C22 C23 C36 C37 C38: "Polarized Capacitor (Surface Mount)", Manufacturer="AVX Corporation", Manufacturer Part Number=NOJA475M010RWJ, Manufacturer Size Code=A, Operating Temperature="-55°C ~ 105°C", Package / Case="1206 (3216 Metric)", Supplier Part Number 1=478-3120-1-ND, Tolerance=±20%, Category=Capacitors, ComponentLink1Description=http://datasheets.avx.com/NOJ.pdf, ComponentLink1URL=http://datasheets.avx.com/NOJ.pdf, Dissipation Factor=6%, Features=-, Height - Seated (Max)="0.071\" (1.80mm)", Mounting Type="Surface Mount", Packaging="Cut Tape (CT)", Part Status=Active, Pricing 1="1=0.68, 10=0.485, 100=0.319, 500=0.2363, 1000=0.20086 (CAD)", RoHS="RoHS Compliant", Size / Dimension="0.126\" L x 0.063\" W (3.20mm x 1.60mm)", Stock 1=5356, Supplier 1=Digi-Key, Supplier Device Package="1206 (3216 Metric)"
C3 C4 C7 C8 C9 C20 C21 C34 C35 C39 C40: "Capacitor (Semiconductor SIM Model)", Capacitance=100nF, Case/Package=0603, Case Code (Metric)=1608, Dielectric=X7R, Manufacturer=Yageo, Manufacturer Part Number=CC0603KRX7R8BB104, Max Operating Temperature=125°C, Min Operating Temperature=-55°C, Package Quantity=1, Supplier Part Number 1=311-1341-1-ND, Tolerance=10%, Voltage=25V, Case Code (Imperial)=0603, Composition=Ceramic, Depth=0.8mm, Halogen Free="Halogen Free", Height=0.8mm, Lead Free="Lead Free", Length=1.6mm, Mount="Surface Mount", Number of Pins=2, Packaging="Tape and Reel", Radiation Hardening=No, REACH SVHC=Unknown, RoHS=Yes, Supplier 1=Digi-Key, Termination=SMD/SMT, Thickness=0.035inch, Voltage Rating=25V, Voltage Rating (DC)=25V, Width=0.8mm
  C3 C4 C7 C8 C9: ComponentLink1Description=https://datasheet.ciiva.com/11786/0900766b80c10176-11786120.pdf?src-supplier=RSComponents, ComponentLink1URL=https://datasheet.ciiva.com/11786/0900766b80c10176-11786120.pdf?src-supplier=RSComponents, ComponentLink2Description=https://datasheet.ciiva.com/144/mlccorderingcode-144075.pdf?src-supplier=Digi-Key, ComponentLink2URL=https://datasheet.ciiva.com/144/mlccorderingcode-144075.pdf?src-supplier=Digi-Key, ComponentLink3Description=https://datasheet.ciiva.com/17434/upy-gphc-x7r-6-3v-to-50v-8-17434263.pdf?src-supplier=Avnet+Europe, ComponentLink3URL=https://datasheet.ciiva.com/17434/upy-gphc-x7r-6-3v-to-50v-8-17434263.pdf?src-supplier=Avnet+Europe, ComponentLink4Description=https://datasheet.ciiva.com/13389/upy-gphc-x7r-6-3v-to-50v-8-13389352.pdf?src-supplier=Mouser, ComponentLink4URL=https://datasheet.ciiva.com/13389/upy-gphc-x7r-6-3v-to-50v-8-13389352.pdf?src-supplier=Mouser, ComponentLink5Description=https://datasheet.ciiva.com/144/mlccorderingcode-144073.pdf?src-supplier=Digi-Key, ComponentLink5URL=https://datasheet.ciiva.com/144/mlccorderingcode-144073.pdf?src-supplier=Digi-Key, ComponentLink6Description=https://datasheet.ciiva.com/144/mlccorderingcode-144074.pdf?src-supplier=Digi-Key, ComponentLink6URL=https://datasheet.ciiva.com/144/mlccorderingcode-144074.pdf?src-supplier=Digi-Key, ComponentLink7Description=https://datasheet.ciiva.com/26829/getdatasheetpartid-403577-26829431.pdf?src-supplier=Verical, ComponentLink7URL=https://datasheet.ciiva.com/26829/getdatasheetpartid-403577-26829431.pdf?src-supplier=Verical, ComponentLink8Description=https://datasheet.ciiva.com/11587/upy-gphc-x7r-6-3v-to-50v-8-11587208.pdf?src-supplier=Avnet, ComponentLink8URL=https://datasheet.ciiva.com/11587/upy-gphc-x7r-6-3v-to-50v-8-11587208.pdf?src-supplier=Avnet, ComponentLink9Description=https://datasheet.ciiva.com/28450/1489800-28450584.pdf?src-supplier=Element14, ComponentLink9URL=https://datasheet.ciiva.com/28450/1489800-28450584.pdf?src-supplier=Element14, ComponentLink10Description=https://datasheet.ciiva.com/7978/1489800-7978155.pdf?src-supplier=Element14, ComponentLink10URL=https://datasheet.ciiva.com/7978/1489800-7978155.pdf?src-supplier=Element14, LatestRevisionDate=29-May-2009, LatestRevisionNote="IPC-7351 Footprint Added.", PackageDescription="Chip Capacitor", PackageReference=C1206, Pricing 1="1 = 0.12000, 10 = 0.08400, 100 = 0.03950, 500 = 0.02770, 1000 = 0.02293 (USD)", Published=8-Jun-2000, Publisher="Altium Limited", Stock 1=23299362
  C20 C21 C34 C35 C39 C40: ComponentLink1Description=http://www.samsungsem.com/servlet/FileDownload?type=spec&file=CL10B104KB8NNNC.pdf, ComponentLink1URL=http://www.samsungsem.com/servlet/FileDownload?type=spec&file=CL10B104KB8NNNC.pdf, ComponentLink2Description=https://datasheet.ciiva.com/11786/0900766b80c10176-11786120.pdf?src-supplier=RSComponents, ComponentLink2URL=https://datasheet.ciiva.com/11786/0900766b80c10176-11786120.pdf?src-supplier=RSComponents, ComponentLink3Description=https://datasheet.ciiva.com/144/mlccorderingcode-144075.pdf?src-supplier=Digi-Key, ComponentLink3URL=https://datasheet.ciiva.com/144/mlccorderingcode-144075.pdf?src-supplier=Digi-Key, ComponentLink4Description=https://datasheet.ciiva.com/17434/upy-gphc-x7r-6-3v-to-50v-8-17434263.pdf?src-supplier=Avnet+Europe, ComponentLink4URL=https://datasheet.ciiva.com/17434/upy-gphc-x7r-6-3v-to-50v-8-17434263.pdf?src-supplier=Avnet+Europe, ComponentLink5Description=https://datasheet.ciiva.com/26829/getdatasheetpartid-403577-26829431.pdf?src-supplier=Verical, ComponentLink5URL=https://datasheet.ciiva.com/26829/getdatasheetpartid-403577-26829431.pdf?src-supplier=Verical, ComponentLink6Description=https://datasheet.ciiva.com/11587/upy-gphc-x7r-6-3v-to-50v-8-11587208.pdf?src-supplier=Avnet, ComponentLink6URL=https://datasheet.ciiva.com/11587/upy-gphc-x7r-6-3v-to-50v-8-11587208.pdf?src-supplier=Avnet, ComponentLink7Description=https://datasheet.ciiva.com/13389/upy-gphc-x7r-6-3v-to-50v-8-13389352.pdf?src-supplier=Mouser, ComponentLink7URL=https://datasheet.ciiva.com/13389/upy-gphc-x7r-6-3v-to-50v-8-13389352.pdf?src-supplier=Mouser, ComponentLink8Description=https://datasheet.ciiva.com/28450/1489800-28450584.pdf?src-supplier=Element14, ComponentLink8URL=https://datasheet.ciiva.com/28450/1489800-28450584.pdf?src-supplier=Element14, ComponentLink9Description=https://datasheet.ciiva.com/144/mlccorderingcode-144073.pdf?src-supplier=Digi-Key, ComponentLink9URL=https://datasheet.ciiva.com/144/mlccorderingcode-144073.pdf?src-supplier=Digi-Key, ComponentLink10Description=https://datasheet.ciiva.com/144/mlccorderingcode-144074.pdf?src-supplier=Digi-Key, ComponentLink10URL=https://datasheet.ciiva.com/144/mlccorderingcode-144074.pdf?src-supplier=Digi-Key, ComponentLink11Description=https://datasheet.ciiva.com/7978/1489800-7978155.pdf?src-supplier=Element14, ComponentLink11URL=https://datasheet.ciiva.com/7978/1489800-7978155.pdf?src-supplier=Element14, Pricing 1="1=0.10000, 10=0.05000, 100=0.02220, 500=0.01584, 1000=0.01245 (USD)", Stock 1=22812167
C5: "Capacitor (Semiconductor SIM Model)", Capacitance=330nF, Case/Package=0603, Case Code (Metric)=1608, Dielectric=Y5V, Manufacturer=Samsung, Manufacturer Part Number=CL10F334ZA8NNNC, Max Operating Temperature=85°C, Min Operating Temperature=-30°C, Package Quantity=1, Supplier Part Number 1=1276-2370-1-ND, Tolerance=80%, Voltage=25V, Case Code (Imperial)=0603, ComponentLink1Description=https://datasheet.ciiva.com/26878/getdatasheetpartid-642180-26878039.pdf?src-supplier=Verical, ComponentLink1URL=https://datasheet.ciiva.com/26878/getdatasheetpartid-642180-26878039.pdf?src-supplier=Verical, ComponentLink2Description=https://datasheet.ciiva.com/16376/cl05b104kq5nnnc-16376699.pdf?src-supplier=Future+Electronics, ComponentLink2URL=https://datasheet.ciiva.com/16376/cl05b104kq5nnnc-16376699.pdf?src-supplier=Future+Electronics, Contact Plating=Tin, Depth=0.8mm, Height=0.8mm, LatestRevisionDate=29-May-2009, LatestRevisionNote="IPC-7351 Footprint Added.", Lead Free="Lead Free", Length=1.6mm, Mount="Surface Mount", PackageDescription="Chip Capacitor", PackageReference=C1206, Packaging="Tape and Reel", Pricing 1="1 = 0.10000, 10 = 0.06700, 100 = 0.02970, 500 = 0.02122, 1000 = 0.01667 (USD)", Published=8-Jun-2000, Publisher="Altium Limited", Radiation Hardening=No, RoHS=Yes, Stock 1=209630, Supplier 1=Digi-Key, Thickness=0.035inch, Voltage Rating=25V, Voltage Rating (DC)=25V, Width=0.031inch
C10: "Capacitor (Semiconductor SIM Model)", Capacitance=1uF, Case/Package=0603, Case Code (Metric)=1608, Dielectric=X5R, Manufacturer="Taiyo Yuden", Manufacturer Part Number=UMK107BJ105KA-T, Max Operating Temperature=85°C, Min Operating Temperature=-55°C, Package Quantity=1, Supplier Part Number 1=587-2400-1-ND, Tolerance=10%, Voltage Rating=50V, Case Code (Imperial)=0603, ComponentLink1Description=https://datasheet.ciiva.com/5744/1697715-5744913.pdf?src-supplier=Farnell, ComponentLink1URL=https://datasheet.ciiva.com/5744/1697715-5744913.pdf?src-supplier=Farnell, ComponentLink2Description=https://datasheet.ciiva.com/11601/umk107bj105ka-t-ss-11601811.pdf?src-supplier=Avnet, ComponentLink2URL=https://datasheet.ciiva.com/11601/umk107bj105ka-t-ss-11601811.pdf?src-supplier=Avnet, ComponentLink3Description=https://datasheet.ciiva.com/15922/336umk107bj105ka-t-15922611.pdf?src-supplier=Onlinecomponents.com, ComponentLink3URL=https://datasheet.ciiva.com/15922/336umk107bj105ka-t-15922611.pdf?src-supplier=Onlinecomponents.com, ComponentLink4Description=https://datasheet.ciiva.com/134/umk107bj105ka-t-ss-134740.pdf?src-supplier=Digi-Key, ComponentLink4URL=https://datasheet.ciiva.com/134/umk107bj105ka-t-ss-134740.pdf?src-supplier=Digi-Key, ComponentLink5Description=https://datasheet.ciiva.com/30199/43umk107bj105ka-t-30199791.pdf?src-supplier=Onlinecomponents.com, ComponentLink5URL=https://datasheet.ciiva.com/30199/43umk107bj105ka-t-30199791.pdf?src-supplier=Onlinecomponents.com, ComponentLink6Description=https://datasheet.ciiva.com/22694/1697715-22694278.pdf?src-supplier=Element14, ComponentLink6URL=https://datasheet.ciiva.com/22694/1697715-22694278.pdf?src-supplier=Element14, ComponentLink7Description=https://datasheet.ciiva.com/7975/1697715-7975608.pdf?src-supplier=Element14, ComponentLink7URL=https://datasheet.ciiva.com/7975/1697715-7975608.pdf?src-supplier=Element14, ComponentLink8Description=https://datasheet.ciiva.com/7975/mlcc-all-e-7975898.pdf?src-supplier=Element14, ComponentLink8URL=https://datasheet.ciiva.com/7975/mlcc-all-e-7975898.pdf?src-supplier=Element14, ComponentLink9Description=https://datasheet.ciiva.com/5427/mlcc-all-e-541559-5427036.pdf?src-supplier=Mouser, ComponentLink9URL=https://datasheet.ciiva.com/5427/mlcc-all-e-541559-5427036.pdf?src-supplier=Mouser, Contact Plating=Nickel, Depth=0.8mm, Halogen Free="Halogen Free", Height=0.8mm, LatestRevisionDate=29-May-2009, LatestRevisionNote="IPC-7351 Footprint Added.", Length=1.6mm, Mount="Surface Mount", Number of Pins=2, PackageDescription="Chip Capacitor", PackageReference=C1206, Packaging="Tape and Reel", Pricing 1="1 = 0.21000, 10 = 0.14600, 100 = 0.06880, 500 = 0.04822, 1000 = 0.03993 (USD)", Published=8-Jun-2000, Publisher="Altium Limited", Radiation Hardening=No, REACH SVHC=Unknown, RoHS=Yes, Stock 1=3042440, Supplier 1=Digi-Key, Termination=SMD/SMT, Thickness=0.035inch, Voltage Rating (DC)=50V, Width=0.031inch
C11 C28: "Capacitor (Semiconductor SIM Model)", Capacitance=10uF, Case/Package=1210, Case Code (Metric)=3225, Dielectric=X7R, Dielectric Material=Ceramic, Manufacturer=TDK, Manufacturer Part Number=C3225X7R1H106M250AC, Max Operating Temperature=125°C, Min Operating Temperature=-55°C, Package Quantity=1000, Supplier Part Number 1=445-14933-1-ND, Tolerance=20%, Voltage Rating=50V, Case Code (Imperial)=1210, Height=2.5mm, Lead Free="Lead Free", Length=0.126inch, Mount="Surface Mount", Packaging="Tape and Reel", REACH SVHC="No SVHC", RoHS=Yes, Supplier 1=Digi-Key, Termination=SMD/SMT, Thickness=0.11inch, Voltage Rating (DC)=50V, Weight=0.000564oz, Width=0.098inch
  C11: ComponentLink1Description=https://datasheet.ciiva.com/24216/cga6p3x7s1h106k250ae-266179-24216129.pdf?src-supplier=Mouser, ComponentLink1URL=https://datasheet.ciiva.com/24216/cga6p3x7s1h106k250ae-266179-24216129.pdf?src-supplier=Mouser, ComponentLink2Description=https://datasheet.ciiva.com/46446/1863333-46446041.pdf?src-supplier=Element14, ComponentLink2URL=https://datasheet.ciiva.com/46446/1863333-46446041.pdf?src-supplier=Element14, ComponentLink3Description=https://datasheet.ciiva.com/46446/1863333-46446042.pdf?src-supplier=Element14, ComponentLink3URL=https://datasheet.ciiva.com/46446/1863333-46446042.pdf?src-supplier=Element14, ComponentLink4Description=http://www.farnell.com/datasheets/2291921.pdf?src-supplier=Farnell, ComponentLink4URL=http://www.farnell.com/datasheets/2291921.pdf?src-supplier=Farnell, ComponentLink5Description=http://www.mouser.com/ds/2/400/tdk_mlcc_commercial_general_en-542463.pdf?src-supplier=Mouser, ComponentLink5URL=http://www.mouser.com/ds/2/400/tdk_mlcc_commercial_general_en-542463.pdf?src-supplier=Mouser, ComponentLink6Description=https://product.tdk.com/info/en/documents/chara_sheet/C3225X7R1H106M250AC.pdf?src-supplier=Digi-Key, ComponentLink6URL=https://product.tdk.com/info/en/documents/chara_sheet/C3225X7R1H106M250AC.pdf?src-supplier=Digi-Key, ComponentLink7Description=http://product.tdk.com/capacitor/mlcc/en/documents/mlcc_commercial_general_en.pdf?src-supplier=Avnet, ComponentLink7URL=http://product.tdk.com/capacitor/mlcc/en/documents/mlcc_commercial_general_en.pdf?src-supplier=Avnet, ComponentLink8Description=http://www.farnell.com/datasheets/1913358.pdf?src-supplier=Element14, ComponentLink8URL=http://www.farnell.com/datasheets/1913358.pdf?src-supplier=Element14, ComponentLink9Description=http://www.farnell.com/datasheets/2291921.pdf?src-supplier=Newark, ComponentLink9URL=http://www.farnell.com/datasheets/2291921.pdf?src-supplier=Newark, Pricing 1="1=1.57000, 10=1.24200, 100=0.93150, 500=0.70380 (USD)", Stock 1=251613
  C28: ComponentLink1Description=http://www.farnell.com/datasheets/2291921.pdf?src-supplier=Farnell, ComponentLink1URL=http://www.farnell.com/datasheets/2291921.pdf?src-supplier=Farnell, ComponentLink2Description=http://www.mouser.com/ds/2/400/tdk_mlcc_commercial_general_en-542463.pdf?src-supplier=Mouser, ComponentLink2URL=http://www.mouser.com/ds/2/400/tdk_mlcc_commercial_general_en-542463.pdf?src-supplier=Mouser, ComponentLink3Description=https://product.tdk.com/info/en/documents/chara_sheet/C3225X7R1H106M250AC.pdf?src-supplier=Digi-Key, ComponentLink3URL=https://product.tdk.com/info/en/documents/chara_sheet/C3225X7R1H106M250AC.pdf?src-supplier=Digi-Key, ComponentLink4Description=http://product.tdk.com/capacitor/mlcc/en/documents/mlcc_commercial_general_en.pdf?src-supplier=Avnet, ComponentLink4URL=http://product.tdk.com/capacitor/mlcc/en/documents/mlcc_commercial_general_en.pdf?src-supplier=Avnet, ComponentLink5Description=http://www.farnell.com/datasheets/1913358.pdf?src-supplier=Element14, ComponentLink5URL=http://www.farnell.com/datasheets/1913358.pdf?src-supplier=Element14, ComponentLink6Description=http://www.farnell.com/datasheets/2291921.pdf?src-supplier=Newark, ComponentLink6URL=http://www.farnell.com/datasheets/2291921.pdf?src-supplier=Newark, LatestRevisionDate=29-May-2009, LatestRevisionNote="IPC-7351 Footprint Added.", PackageDescription="Chip Capacitor", PackageReference=C1206, Pricing 1="1 = 1.57000, 10 = 1.24200, 100 = 0.93150, 500 = 0.70380 (USD)", Published=8-Jun-2000, Publisher="Altium Limited", Stock 1=227657
C12 C24: "Capacitor (Semiconductor SIM Model)", Capacitance=10uF, Case/Package=1206, Case Code (Metric)=3216, Dielectric=X5R, Manufacturer=Samsung, Manufacturer Part Number=CL31A106KAHNNNE, Max Operating Temperature=85°C, Min Operating Temperature=-55°C, Supplier Part Number 1=1276-1075-1-ND, Tolerance=10%, Voltage=25V, Case Code (Imperial)=1206, Contact Plating=Tin, Depth=1.6mm, Height=1.6mm, Lead Free="Lead Free", Length=3.2mm, Material=Ceramic, Mount="Surface Mount", Packaging="Tape and Reel", Radiation Hardening=No, RoHS=Yes, Supplier 1=Digi-Key, Thickness=0.071inch, Voltage Rating=25V, Voltage Rating (DC)=25V, Width=0.063inch
  C12: ComponentLink1Description=https://datasheet.ciiva.com/25710/cl31a106kahnnne-25710837.pdf?src-supplier=Digi-Key, ComponentLink1URL=https://datasheet.ciiva.com/25710/cl31a106kahnnne-25710837.pdf?src-supplier=Digi-Key, ComponentLink2Description=https://datasheet.ciiva.com/15195/getdatasheetpartid-355210-15195990.pdf?src-supplier=Verical, ComponentLink2URL=https://datasheet.ciiva.com/15195/getdatasheetpartid-355210-15195990.pdf?src-supplier=Verical, ComponentLink3Description=https://datasheet.ciiva.com/29201/452519-da-01-en-vs-kondensator-1206-29201124.pdf?src-supplier=Conrad, ComponentLink3URL=https://datasheet.ciiva.com/29201/452519-da-01-en-vs-kondensator-1206-29201124.pdf?src-supplier=Conrad, LatestRevisionDate=29-May-2009, LatestRevisionNote="IPC-7351 Footprint Added.", PackageDescription="Chip Capacitor", PackageReference=C1206, Pricing 1="1 = 0.22000, 10 = 0.15000, 100 = 0.07600, 500 = 0.05200, 1000 = 0.04600 (USD)", Published=8-Jun-2000, Publisher="Altium Limited", Stock 1=1234131
  C24: ComponentLink1Description=http://www.yuden.co.jp/productdata/catalog/en/mlcc06_e.pdf, ComponentLink1URL=http://www.yuden.co.jp/productdata/catalog/en/mlcc06_e.pdf, ComponentLink2Description=https://datasheet.ciiva.com/25710/cl31a106kahnnne-25710837.pdf?src-supplier=Digi-Key, ComponentLink2URL=https://datasheet.ciiva.com/25710/cl31a106kahnnne-25710837.pdf?src-supplier=Digi-Key, ComponentLink3Description=https://datasheet.ciiva.com/15195/getdatasheetpartid-355210-15195990.pdf?src-supplier=Verical, ComponentLink3URL=https://datasheet.ciiva.com/15195/getdatasheetpartid-355210-15195990.pdf?src-supplier=Verical, ComponentLink4Description=https://datasheet.ciiva.com/29201/452519-da-01-en-vs-kondensator-1206-29201124.pdf?src-supplier=Conrad, ComponentLink4URL=https://datasheet.ciiva.com/29201/452519-da-01-en-vs-kondensator-1206-29201124.pdf?src-supplier=Conrad, Pricing 1="1=0.22000, 10=0.15000, 100=0.07600, 500=0.05200, 1000=0.04600 (USD)", Stock 1=1042987
C25: "Capacitor (Semiconductor SIM Model)", Capacitance=100uF, Case/Package=1206, Case Code (Metric)=3216, Dielectric=X5R, Manufacturer=Samsung, Manufacturer Part Number=CL31A107MQHNNNE, Max Operating Temperature=85°C, Min Operating Temperature=-55°C, Package Quantity=2000, Supplier Part Number 1=1276-1782-1-ND, Tolerance=20%, Voltage=6.3V, Case Code (Imperial)=1206, ComponentLink1Description=https://datasheet.ciiva.com/20173/71-0886-20173093.pdf, ComponentLink1URL=https://datasheet.ciiva.com/20173/71-0886-20173093.pdf, ComponentLink2Description=https://datasheet.ciiva.com/25723/cl31a107mqhnnne-25723159.pdf, ComponentLink2URL=https://datasheet.ciiva.com/25723/cl31a107mqhnnne-25723159.pdf, ComponentLink3Description=https://datasheet.ciiva.com/16437/cl31a107mqhnnne-16437212.pdf, ComponentLink3URL=https://datasheet.ciiva.com/16437/cl31a107mqhnnne-16437212.pdf, ComponentLink4Description=https://datasheet.ciiva.com/15195/getdatasheetpartid-358449-15195997.pdf, ComponentLink4URL=https://datasheet.ciiva.com/15195/getdatasheetpartid-358449-15195997.pdf, ComponentLink5Description=https://datasheet.ciiva.com/29201/452463-da-01-en-vs-kondensator-1206-29201265.pdf, ComponentLink5URL=https://datasheet.ciiva.com/29201/452463-da-01-en-vs-kondensator-1206-29201265.pdf, Contact Plating=Tin, Depth=1.6mm, Height=1.6mm, LatestRevisionDate=29-May-2009, LatestRevisionNote="IPC-7351 Footprint Added.", Length=3.2mm, Material=Ceramic, Mount="Surface Mount", PackageDescription="Chip Capacitor", PackageReference=C1206, Packaging="Tape and Reel", Pricing 1="1=0.64, 10=0.456, 100=0.3001, 500=0.2223, 1000=0.189 (USD)", Published=8-Jun-2000, Publisher="Altium Limited", Radiation Hardening=No, Stock 1=76664, Supplier 1=Digi-Key, Thickness=0.071inch, Voltage Rating=6.3V, Width=0.063inch
C26: "Capacitor (Semiconductor SIM Model)", Capacitance=470nF, Case/Package=0603, Case Code (Metric)=1608, Dielectric=X7R, Manufacturer=Murata, Manufacturer Part Number=GRM188R71E474KA12D, Max Operating Temperature=125°C, Min Operating Temperature=-55°C, Package Quantity=4000, Supplier Part Number 1=490-3291-1-ND, Tolerance=10%, Voltage=50V, Voltage Rating=25V, Case Code (Imperial)=0603, ComponentLink1Description=https://datasheet.ciiva.com/16293/grm188r71e474ka12d-16293088.pdf?src-supplier=Future+Electronics, ComponentLink1URL=https://datasheet.ciiva.com/16293/grm188r71e474ka12d-16293088.pdf?src-supplier=Future+Electronics, ComponentLink2Description=https://datasheet.ciiva.com/7937/1747458-7937650.pdf?src-supplier=Element14, ComponentLink2URL=https://datasheet.ciiva.com/7937/1747458-7937650.pdf?src-supplier=Element14, ComponentLink3Description=https://datasheet.ciiva.com/134/grm188r71e474ka12-01-134310.pdf?src-supplier=Digi-Key, ComponentLink3URL=https://datasheet.ciiva.com/134/grm188r71e474ka12-01-134310.pdf?src-supplier=Digi-Key, ComponentLink4Description=https://datasheet.ciiva.com/34302/1857559-34302862.pdf?src-supplier=Jameco, ComponentLink4URL=https://datasheet.ciiva.com/34302/1857559-34302862.pdf?src-supplier=Jameco, ComponentLink5Description=https://datasheet.ciiva.com/29199/454518-da-01-en-vs-kondensator-0603-29199596.pdf?src-supplier=Conrad, ComponentLink5URL=https://datasheet.ciiva.com/29199/454518-da-01-en-vs-kondensator-0603-29199596.pdf?src-supplier=Conrad, ComponentLink6Description=https://datasheet.ciiva.com/134/grm188r71e474ka12-01-134308.pdf?src-supplier=Digi-Key, ComponentLink6URL=https://datasheet.ciiva.com/134/grm188r71e474ka12-01-134308.pdf?src-supplier=Digi-Key, ComponentLink7Description=https://datasheet.ciiva.com/134/grm188r71e474ka12-01-134309.pdf?src-supplier=Digi-Key, ComponentLink7URL=https://datasheet.ciiva.com/134/grm188r71e474ka12-01-134309.pdf?src-supplier=Digi-Key, ComponentLink8Description=https://datasheet.ciiva.com/22703/1747458-22703340.pdf?src-supplier=Element14, ComponentLink8URL=https://datasheet.ciiva.com/22703/1747458-22703340.pdf?src-supplier=Element14, Depth=0.8mm, Height=0.8mm, LatestRevisionDate=29-May-2009, LatestRevisionNote="IPC-7351 Footprint Added.", Lead Free="Lead Free", Length=1.6mm, Material=Ceramic, Mount="Surface Mount", Number of Pins=2, PackageDescription="Chip Capacitor", PackageReference=C1206, Packaging="Tape and Reel", Pricing 1="1 = 0.25000, 10 = 0.16800, 100 = 0.08520, 500 = 0.05832, 1000 = 0.05159 (USD)", Published=8-Jun-2000, Publisher="Altium Limited", REACH SVHC="No SVHC", RoHS=Yes, Stock 1=187331, Supplier 1=Digi-Key, Termination=SMD/SMT, Thickness=0.035inch, Voltage Rating (DC)=25V, Width=0.031inch